# Altium PCB PCB_MRR_ESP_3DP_v0.6.pcbdoc (part 2 of 2)
Units mil, origin at the board's own origin, x right, y up, seen from the top; angles counter-clockwise.
Board outline 5400 x 5140 mil, 2 copper layers (Top Layer, Bottom Layer); 119 components, 151 nets, 453 pads, 98 vias.
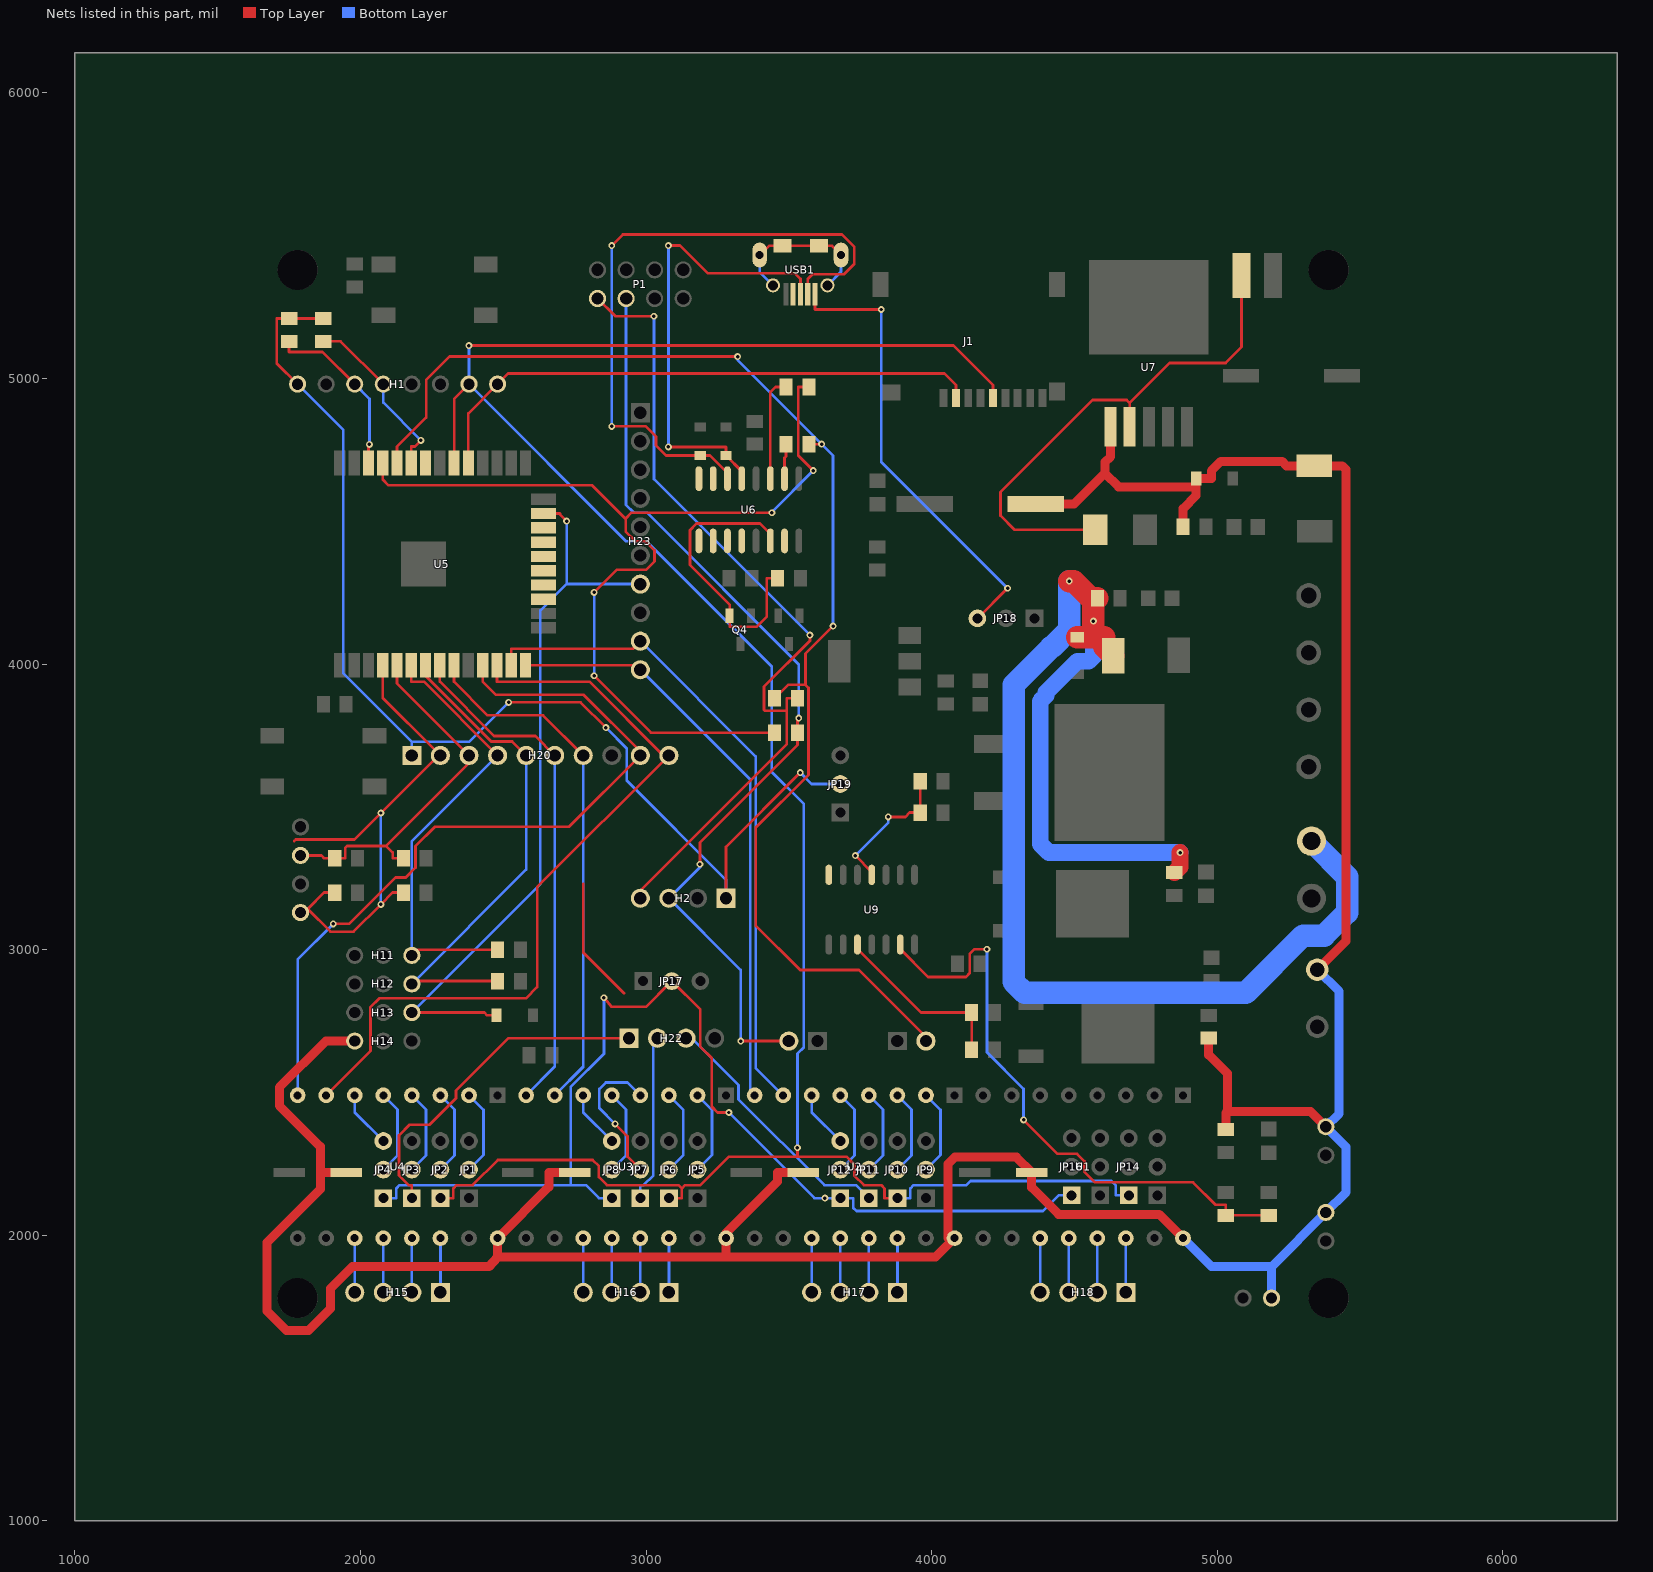
[diagram p2: the nets of this part, all layers, seen from the top]

## Via types
v1: diameter 24.02, hole 12.2, Top Layer to Bottom Layer, 56 vias
v2: diameter 24.4, hole 12, Top Layer to Bottom Layer, 42 vias

## Nets (pads, with @x,y where several pads share a name; then routed paths per layer and width w, separated by ;. In a path a pad name is that pad's centre, name@x,y a point inside that pad or via, vN(x,y) a via of type N, cw(c..) or ccw(c..) an arc to the next point about the centre after c; other vN are vias at no path point) (continued)
RTS: Q4.2 R18.1 U6.14 | length 1041.8
  Top Layer w9.45: U6.14@3435,4431 3435,4455.4 3398.6,4491.8 3177.3,4491.8 3154.1,4468.5 3154.1,4346.6 3292.6,4208.1 Q4.2@3292.6,4169.2 3292.6,4149.8 3292.6,4130.3 3387.2,4130.3 3422.9,4166.1 3422.9,4300 R18.1@3459.99,4300.01
RX: JP21.2 R17.2 R28.1 U5.34 | length 4653
  Top Layer w9.45: U5.34@2128,4704 2128,4761.6 2230,4863.6 2230,4994.7 2311.8,5076.5 v1(3320.5,5076.5) ; R28.1@3450,3880 3497.3,3927.3 3558.3,3927.3 ; R17.2@3569.99,4770.01 3607.1,4770 v1(3614.7,4770) ; v1(3654.7,4132.8) 3558.3,4036.5 3558.3,3927.3 ; JP21.2@3980,2680 3980,2694.3 3745.5,2928.9 3539.8,2928.9 3383.9,3084.8 3383.9,3426.9 3568.7,3611.7 3568.7,3916.9 3558.3,3927.3
  Bottom Layer w9.45: v1(3320.5,5076.5) 3320.5,5064.2 v1(3614.7,4770) 3654.7,4730 v1(3654.7,4132.8)
RXD: H2.4 P1.8 R28.2 | length 2925.3
  Top Layer w9.45: P1.8@2830,5280 2892.2,5217.8 v1(3027.7,5217.8) ; H2.4@2980,3180 2980,3206.9 3492.9,3719.8 3492.9,3836.8 ; R28.2@3530,3880 3492.9,3880 3492.9,3836.8 ; v1(3573.8,4101.2) 3573.8,4081.7 3412.9,3920.9 3412.9,3839.6 3415.7,3836.8 3492.9,3836.8
  Bottom Layer w9.45: v1(3027.7,5217.8) 3027.7,4647.3 v1(3573.8,4101.2)
S$15: 
S$17: 
S$18: 
S$19: 
S$20: 
S$39: 
S$41: 
S$43: 
S$91: 
S$93: 
S$150: 
S$152: 
S$180: 
S$236: 
S$240: 
S$270066:  | length 441.7
  Top Layer w9.45: 2780,3230 2780,2990 2922.6,2847.4
SCK: H1.7 J1.5 JP2.1 JP6.1 JP10.1 JP14.1 U5.30 | length 8475.6
  Top Layer w9.45: JP2.1@2280,2130 2325.3,2130 2325.3,2163.9 2336.6,2175.3 2392.6,2175.3 2481,2263.6 2813.2,2263.6 2834.7,2242.1 2834.7,2203.7 2863.2,2175.3 3113.9,2175.3 3125.3,2163.9 ; U5.30@2327.9,4703.9 2327.9,4927.9 H1.7@2380,4980 ; v1(2380,5115.3) 4076.5,5115.3 4215,4976.8 4215,4953.9 J1.5@4215,4931 ; JP6.1@3080,2130 3125.3,2130 3125.3,2163.9 ; v1(3530,2306.6) 3530,2275.3 ; JP10.1@3880,2130 3834.7,2130 3834.7,2163.9 3823.4,2175.3 3762.4,2175.3 3730,2207.6 3730,2247 3701.8,2275.3 3530,2275.3 ; 3125.3,2163.9 3136.6,2175.3 3190,2175.3 3290,2275.3 3530,2275.3
  Bottom Layer w9.45: v1(2380,5115.3) H1.7@2380,4980 2930,4430 3001.9,4430 3440,3991.9 3440,3621.8 3552.3,3509.5 3552.3,2658.3 3530,2636 v1(3530,2306.6) ; JP10.1@3880,2130 3925.3,2130 3925.3,2163.9 3936.6,2175.3 4121.5,2175.3 4136.2,2190 4628.7,2190 4644.7,2173.9 4644.7,2140 JP14.1@4690,2140
SCL: H1.3 R20.1 U5.36 | length 612.8
  Top Layer w9.45: R20.1@1750,5130 1750,5092.9 1867.1,5092.9 H1.3@1980,4980 ; U5.36@2028,4704 2028,4765.5 v1(2031.6,4769)
  Bottom Layer w9.45: H1.3@1980,4980 2031.6,4928.4 v1(2031.6,4769)
SDA: H1.4 R21.1 U5.33 | length 624
  Top Layer w9.45: R21.1@1870,5130 1930,5130 H1.4@2080,4980 ; U5.33@2178,4704 2178,4761.6 2190.3,4761.6 v1(2211.9,4783.2)
  Bottom Layer w9.45: H1.4@2080,4980 2080,4915.1 v1(2211.9,4783.2)
SS: H1.8 J1.2 U5.29 | length 2001.4
  Top Layer w9.45: U5.29@2377.9,4703.9 2377.9,4877.9 H1.8@2480,4980 2517.3,5017.3 4044.4,5017.3 4085,4976.8 J1.2@4085,4931
TEMP_BED_PIN: C6.1 H10.1 H20.3 R12.1 U5.5 | length 1290.8
  Top Layer w9.45: H10.1@1790,3330 1862.9,3330 1872.9,3320 C6.1@1910,3320 1947.1,3320 1947.1,3357.1 1953.2,3363.2 2090.1,3363.2 ; U5.5@2127.9,3995.9 2127.9,3932.1 H20.3@2380,3680 2380,3653.1 2090.1,3363.2 ; R12.1@2149.99,3320.01 2112.9,3320 2112.9,3340.3 2090.1,3363.2
TEMP_E0_PIN: C5.1 H9.1 H20.2 R11.1 U5.4 | length 1927.6
  Top Layer w9.45: 1767.9,3380 1773.6,3385.7 1978.5,3385.7 v2(2071.4,3478.6) 2260.9,3668.1 H20.2@2260.9,3680 ; H9.1@1790,3130 1802.4,3142.4 1815.3,3142.4 H9.1@1815.4,3142.4 ; C5.1@1910,3200 1872.9,3200 H9.1@1815.4,3142.4 ; U5.4@2077.9,3995.9 2077.9,3882.1 2260.9,3699.1 H20.2@2260.9,3680 ; R11.1@2149.99,3200.01 2112.9,3200 v2(2071.47,3158.53) 1975.9,3062.9 1894.8,3062.9 H9.1@1815.4,3142.4 ; H20.2@2280,3680 H20.2@2260.9,3680
  Bottom Layer w9.45: v2@2070,3160 2071.4,3161.4 v2(2071.4,3478.6)
TMC: JP4.1 JP8.1 JP12.1 JP16.1 JP17.2 | length 3803.8
  Top Layer w9.45: v1(2852.4,2831.9) 2880,2800 3000,2800 3084.1,2884.1 JP17.2@3090,2890 3190,2790 3190,2660 3230,2620 3230,2450 3250,2430 v2(3290,2430)
  Bottom Layer w9.45: JP4.1@2080,2130 2125.3,2130 2125.3,2163.9 2136.6,2175.3 2736.1,2175.3 ; v1(2852.4,2831.9) 2852.4,2635.5 2736.1,2519.2 2736.1,2175.3 ; JP8.1@2880,2130 2834.7,2130 2789.5,2175.3 2736.1,2175.3 ; v2(3290,2430) 3590,2130 v1(3626,2130) JP12.1@3680,2130 3702.6,2130 3725.3,2130 3725.3,2096 3736.6,2084.7 4389.5,2084.7 4444.7,2140 JP16.1@4490,2140
TO_E0: R7.1 R8.1 U9.13 | length 2130.3
  Top Layer w9.45: U9.13@3890,3018 3890,3002.1 3987.6,2904.5 4120,2904.5 4132.9,2917.4 4132.9,2984.8 4149.7,3001.7 v1(4193.6,3001.7) ; v1(4321.8,2404.2) 4440.7,2285.3 4509,2285.3 4535.3,2259 4535.3,2222.2 4572.2,2185.3 4914.7,2185.3 4992.9,2107.1 5030,2107.1 5030,2069.9 R8.1@5180,2069.9
  Bottom Layer w9.45: v1(4193.6,3001.7) 4193.6,2640.9 4321.8,2512.7 v1(4321.8,2404.2)
TO_FAN_E0: R9.1 R10.1 U9.10 | length 637.5
  Top Layer w9.45: U9.10@3740,3018 3740,3002.7 3962.7,2780 R9.1@4139.96,2780.01 R10.1@4139.96,2650.01
TO_HEAT_BED: R5.1 R6.1 U9.4 | length 502.4
  Top Layer w9.45: v1(3733.1,3329.5) 3790,3272.6 U9.4@3790,3262 ; v1(3847.8,3464.8) 3907.7,3464.8 3922.9,3480 R6.1@3959.99,3480.01 R5.1@3959.99,3590.01
  Bottom Layer w9.45: v1(3733.1,3329.5) 3847.8,3444.1 v1(3847.8,3464.8)
TX: R16.2 R27.1 U5.35 | length 3518.6
  Top Layer w9.45: U5.35@2078,4704 2078,4646.4 2098.6,4625.9 2811.5,4625.9 2928.6,4508.8 ; v1(2818.1,3959.2) 3017.3,3760 R27.1@3450,3760 ; v1(2818.1,4250.9) 2897.2,4330 2999.8,4330 3029.3,4359.5 3029.3,4398.2 2997.5,4430 2962.5,4430 2928.6,4463.9 2928.6,4508.8 ; v1(3440.5,4530) 2949.7,4530 2928.6,4508.8 ; R16.2@3569.99,4970.01 3532.9,4970 3532.9,4729.6 v1(3585.4,4677.2)
  Bottom Layer w9.45: v1(2818.1,3959.2) v1(2818.1,4250.9) ; v1(3440.5,4530) 3440.5,4532.2 v1(3585.4,4677.2)
TXD: H2.3 JP20.2 P1.6 R27.2 | length 3338.5
  Top Layer w9.45: v1(3188.6,3299) 3188.6,3375.4 3530,3716.8 R27.2@3530,3760 3530,3806.6 v1(3534.5,3811) ; v1(3331.3,2680) JP20.2@3500,2680
  Bottom Layer w9.45: P1.6@2930,5280 2930,4556.9 2956.9,4530 3003.1,4530 3534.5,3998.6 v1(3534.5,3811) ; v1(3188.6,3299) 3188.6,3288.6 H2.3@3080,3180 3331.3,2928.7 v1(3331.3,2680)
U1_11: H18.4 U1.11 | length 190
  Bottom Layer w9.45: H18.4@4380,1800 U1.11@4380,1990
U1_12: H18.3 U1.12 | length 190
  Bottom Layer w9.45: H18.3@4480,1800 U1.12@4480,1990
U1_13: H18.2 U1.13 | length 190
  Bottom Layer w9.45: H18.2@4580,1800 U1.13@4580,1990
U1_14: H18.1 U1.14 | length 190
  Bottom Layer w9.45: H18.1@4680,1800 U1.14@4680,1990
U2_11: H17.4 U2.11 | length 190
  Bottom Layer w9.45: H17.4@3580,1800 U2.11@3580,1990
U2_12: H17.3 U2.12 | length 190
  Bottom Layer w9.45: H17.3@3680,1800 U2.12@3680,1990
U2_13: H17.2 U2.13 | length 190
  Bottom Layer w9.45: H17.2@3780,1800 U2.13@3780,1990
U2_14: H17.1 U2.14 | length 190
  Bottom Layer w9.45: H17.1@3880,1800 U2.14@3880,1990
U3_11: H16.4 U3.11 | length 190
  Bottom Layer w9.45: H16.4@2780,1800 U3.11@2780,1990
U3_12: H16.3 U3.12 | length 190
  Bottom Layer w9.45: H16.3@2880,1800 U3.12@2880,1990
U3_13: H16.2 U3.13 | length 190
  Bottom Layer w9.45: H16.2@2980,1800 U3.13@2980,1990
U3_14: H16.1 U3.14 | length 190
  Bottom Layer w9.45: H16.1@3080,1800 U3.14@3080,1990
U4_11: H15.4 U4.11 | length 190
  Bottom Layer w9.45: H15.4@1980,1800 U4.11@1980,1990
U4_12: H15.3 U4.12 | length 190
  Bottom Layer w9.45: H15.3@2080,1800 U4.12@2080,1990
U4_13: H15.2 U4.13 | length 190
  Bottom Layer w9.45: H15.2@2180,1800 U4.13@2180,1990
U4_14: H15.1 U4.14 | length 190
  Bottom Layer w9.45: H15.1@2280,1800 U4.14@2280,1990
U5_17: U5.17
U5_18: U5.18
U5_19: U5.19
U5_20: U5.20
U5_21: U5.21
U5_22: U5.22
U5_32: U5.32
U6_2: R17.1 U6.2 | length 123.1
  Top Layer w9.45: U6.2@3485,4649 3485,4721.9 3490,4726.8 R17.1@3489.99,4770.01
U6_3: R16.1 U6.3 | length 365.5
  Top Layer w9.45: U6.3@3435,4649 3435,4952.1 3452.9,4970 R16.1@3489.99,4970.01
U6_5: D5.1 U6.5 USB1.3 | length 1604.5
  Top Layer w9.45: v1(3078.4,4760.1) 3280,4760.1 D5.1@3280,4730.05 3335,4675 U6.5@3335,4649 ; v1(3078.4,5465.2) 3118.9,5465.2 3216.2,5368 3521.2,5368 3540.5,5348.8 USB1.3@3540.5,5295.1
  Bottom Layer w9.45: v1(3078.4,4760.1) v1(3078.4,5465.2)
U6_6: D6.1 U6.6 USB1.2 | length 2325
  Top Layer w9.45: v1(2880,4832.3) 2999.4,4832.3 3034.9,4796.9 3034.9,4765.3 3070.1,4730 D6.1@3190,4730.05 3198.5,4730 3207,4730 3224,4730 3285,4669 U6.6@3285,4649 ; v1(2880,5465.2) 2918.8,5504 3685.8,5504 3728.4,5461.4 3728.4,5399.8 3693.5,5364.9 3582.1,5364.9 3566,5348.8 USB1.2@3566,5295.1
  Bottom Layer w9.45: v1(2880,4832.3) v1(2880,5465.2)
U6_7: U6.7
U6_8: U6.8
U6_9: U6.9
U6_10: U6.10
U6_11: U6.11
U6_12: U6.12
U6_15: U6.15
U7_2: D4.2 L1.1 U7.2 | length 1830.6
  Top Layer w9.45: D4.2@4573,4470 4290.8,4470 4241.1,4519.7 4241.1,4601.7 4563.8,4924.4 4682.8,4924.4 4693.1,4914.2 ; U7.2@4693.1,4831 4693.1,4914.2 ; L1.1@5084.9,5360 5084.9,5109.8 5029.4,5054.3 4833.2,5054.3 4693.1,4914.2
U9_7: U9.7
USB1_0: USB1.0 | length 564.6
  Top Layer w9.45: USB1.0@3397.5,5432.31 3398.9,5432.3 3431.4,5464.9 USB1.0@3477.2,5464.9 3523,5464.9 3523.6,5464.2 USB1.0@3606.3,5464.25 3629.2,5464.2 3652.1,5464.2 3652.1,5462.7 USB1.0@3682.5,5432.31
  Bottom Layer w9.45: USB1.0@3397.5,5432.31 3397.5,5372.8 USB1.0@3444.3,5326.01 ; USB1.0@3634.9,5326.01 3682.5,5373.6 USB1.0@3682.5,5432.31
USB1_4: USB1.4
VBED: CN2.2 D2.2 F1.2 R3.1 R14.1 | length 4981.8
  Top Layer w59.05: R3.1@4850.01,3270.01 4870,3290 v2(4870,3340)
  Top Layer w78.74: v1(4481.5,4290.2) 4497.2,4290.2 R14.1@4566.3,4221.1 ; D2.2@4510,4094 4557.4,4094 ; R14.1@4580,4230 4575.2,4230 R14.1@4566.3,4221.1 ; F1.2@4635.7,4029.5 4604.9,4060.3 4604.9,4094 4557.4,4094 ; 4557.4,4094 4566.3,4102.9 v2(4566.3,4150) R14.1@4566.3,4221.1
  Bottom Layer w59.05: v2(4566.3,4150) 4566.3,4026.3 4550,4010 4510,4010 4400,3900 4400,3890 4380,3870 4380,3370 4410,3340 v2(4870,3340)
  Bottom Layer w78.74: v1(4481.5,4290.2) 4481.5,4119.3 4420.4,4058.1 4417.7,4058.1 4287,3927.4 4287,2887.2 4325.1,2849.1 5100.2,2849.1 5300.2,3049.1 5374,3049.1 5454.7,3129.8 5454.7,3255.3 CN2.2@5330,3380
VIN: C1.1 C2.1 C3.1 C4.1 C9.1 D1.2 F2.2 H7.1 H8.1 H14.1 H19.1 P7.2 R1.1 R2.1 R13.1 U1.16 U2.16 U3.16 U4.16 U7.1 | length 11898.8
  Top Layer w31.5: C1.1@1950,2220 1859.4,2220 ; H14.1@1980,2680 1878.5,2680 1716.1,2517.6 1716.1,2453.9 1859.4,2310.6 1859.4,2220 ; C2.1@2750,2220 2659.4,2220 2659.4,2169.4 U4.16@2480,1990 2480,1923.2 ; C3.1@3550,2220 3459.4,2220 3459.4,2188.2 3280,2008.7 U3.16@3280,1990 3280,1923.2 ; C9.1@4364,4560 4497.9,4560 4606.4,4668.6 ; U7.1@4626.1,4831 4626.1,4726.6 4606.4,4707 4606.4,4668.6 ; U1.16@4880,1990 4796.5,2073.5 4444.3,2073.5 4350,2167.8 C4.1@4350,2220 4296.4,2273.6 4081,2273.6 4057.8,2250.4 4057.8,1990 U2.16@4080,1990 4057.8,1967.8 4013.2,1923.2 3280,1923.2 ; R13.1@4880,4480 4880,4544.5 4926,4590.5 4926,4620.3 ; R1.1@4970,2690 4970,2631.7 5034.9,2566.9 5034.9,2433.1 ; R2.1@5030.1,2370 5030.1,2428.3 5034.9,2433.1 ; P7.2@5350,2930 5449.8,3029.8 5449.8,4681.5 5437,4694.3 5339.5,4694.3 5242,4694.3 5226.9,4709.5 5012.2,4709.5 4979.4,4676.7 4979.4,4650 D1.2@4926,4650 4926,4620.3 ; H19.1@5380,2380 5326.9,2433.1 5034.9,2433.1 ; 1859.4,2220 1859.4,2161.3 1673.5,1975.4 1673.5,1734.5 1741.6,1666.5 1817.9,1666.5 1895.9,1744.5 1895.9,1814.5 1971.3,1890 2450,1890 2480,1923.2 ; 2480,1923.2 3280,1923.2 ; 4606.4,4668.6 4654.7,4620.3 4926,4620.3
  Bottom Layer w31.5: U1.16@4880,1990 4980,1890 5190,1890 ; H8.1@5190,1780 5190,1890 ; P7.2@5350,2930 5426.3,2853.7 5426.3,2426.3 H19.1@5380,2380 5451.2,2308.8 5451.2,2151.2 H7.1@5380,2080 5190,1890
VOUT: H1.1 H2.1 H20.1 JP19.2 R20.2 R21.2 | length 4138.5
  Top Layer w9.45: H1.1@1780,4980 1706.8,5053.2 1706.8,5210 R20.2@1750,5210 R21.2@1870,5210 ; v1(2518.8,3865.9) 2770.9,3865.9 v1(2859.5,3777.3) ; H2.1@3280,3180 3280,3360.2 v1(3539.8,3620)
  Bottom Layer w9.45: H1.1@1780,4980 1940,4820 1940,3967.7 2180,3727.7 ; H20.1@2180,3680 2180,3723 2180,3727.7 ; v1(2518.8,3865.9) 2380.6,3727.7 2180,3727.7 ; v1(2859.5,3777.3) 2932.3,3704.5 2932.3,3592.4 3280,3244.7 3280,3227.8 H2.1@3280,3180 ; v1(3539.8,3620) 3579.8,3580 JP19.2@3680,3580
VUSB: JP18.3 USB1.1 | length 1593.7
  Top Layer w9.45: USB1.1@3591.6,5295.1 3591.6,5241.4 v1(3823.4,5241.4) ; JP18.3@4160,4160 v1(4265.5,4265.5)
  Bottom Layer w9.45: v1(3823.4,5241.4) 3823.4,4707.6 v1(4265.5,4265.5)
X_CS: H22.1 JP3.1 | length 1207.2
  Top Layer w9.45: JP3.1@2180,2130 2180,2175.3 2168.7,2175.3 2134.7,2209.2 2134.7,2349.8 2172,2387 2241.9,2387 2334.7,2479.8 2334.7,2506.7 2518,2690 2892.2,2690 H22.1@2940,2690
X_DIR_PIN: H20.9 U4.8 U5.11 | length 2740.5
  Top Layer w9.45: v1(1904.7,3090.4) 1960.2,3090.4 2122.5,3252.7 2158.5,3252.7 2192.9,3287.1 2192.9,3362.2 2261.2,3430.4 2730.5,3430.4 H20.9@2980,3680 2980,3694 2781.8,3892.2 2473.9,3892.2 2427.8,3938.2 U5.11@2427.8,3995.8
  Bottom Layer w9.45: U4.8@1780,2490 1780,2965.8 v1(1904.7,3090.4)
X_MIN: H11.3 H20.4 R24.1 U5.6 | length 1599.2
  Top Layer w9.45: U5.6@2177.9,3995.9 2177.9,3938.3 2221.7,3938.3 H20.4@2480,3680 ; H11.3@2180,2980 2200,3000 R24.1@2480,3000
  Bottom Layer w9.45: H11.3@2180,2980 2180,3380 H20.4@2480,3680
X_MS1: JP1.2 U4.2 | length 302.3
  Bottom Layer w9.45: JP1.2@2380,2230 2431,2280.9 2431,2439 U4.2@2380,2490
X_MS2: JP2.2 U4.3 | length 300.8
  Bottom Layer w9.45: JP2.2@2280,2230 2329.3,2279.3 2329.3,2440.7 U4.3@2280,2490
X_MS3: JP3.2 U4.4 | length 300.9
  Bottom Layer w9.45: JP3.2@2180,2230 2229.4,2279.4 2229.4,2440.6 U4.4@2180,2490
X_RST: JP4.2 U4.5 | length 301.4
  Bottom Layer w9.45: JP4.2@2080,2230 2130,2280 2130,2440 U4.5@2080,2490
X_SLP: JP4.3 U4.6 | length 201.4
  Bottom Layer w9.45: U4.6@1980,2490 1980,2430 JP4.3@2080,2330
X_STEP_PIN: H20.10 U4.7 U5.12 | length 2754.7
  Top Layer w9.45: U4.7@1880,2490 2035.3,2645.2 2035.3,2798.8 2065.8,2829.4 2579.6,2829.4 2618.8,2868.6 2618.8,3218.8 H20.10@3080,3680 3060.2,3680 2801.8,3938.3 2477.9,3938.3 U5.12@2477.9,3995.9
Y_CS: H22.2 JP7.1 | length 591.5
  Bottom Layer w9.45: JP7.1@2980,2130 2980,2175.3 2991.3,2175.3 3025.3,2209.2 3025.3,2675.3 H22.2@3040,2690
Y_DIR_PIN: H20.6 U3.8 U5.8 | length 1798.2
  Top Layer w9.45: U5.8@2277.8,3995.8 2277.8,3938.2 2468.1,3747.9 2612.1,3747.9 H20.6@2680,3680
  Bottom Layer w9.45: U3.8@2580,2490 2680,2590 H20.6@2680,3680
Y_MIN: H12.3 H20.5 R25.1 U5.7 | length 1774.4
  Top Layer w9.45: H12.3@2180,2880 2190,2890 R25.1@2480,2890 ; U5.7@2227.9,3995.9 2227.9,3959 2458,3728.9 2531.1,3728.9 H20.5@2580,3680
  Bottom Layer w9.45: H12.3@2180,2880 2580,3280 H20.5@2580,3680
Y_MS1: JP5.2 U3.2 | length 302.3
  Bottom Layer w9.45: JP5.2@3180,2230 3231,2280.9 3231,2439 U3.2@3180,2490
Y_MS2: JP6.2 U3.3 | length 301.4
  Bottom Layer w9.45: JP6.2@3080,2230 3130,2280 3130,2440 U3.3@3080,2490
Y_MS3: JP7.2 U3.4 | length 513.5
  Top Layer w9.45: v1(2891.4,2389.8) 2934.7,2346.5 2934.7,2275.3 JP7.2@2980,2230
  Bottom Layer w9.45: v1(2891.4,2389.8) 2836.5,2444.7 2836.5,2512.6 2859,2535.1 2934.9,2535.1 U3.4@2980,2490
Y_RST: JP8.2 U3.5 | length 301.4
  Bottom Layer w9.45: JP8.2@2880,2230 2930,2280 2930,2440 U3.5@2880,2490
Y_SLP: JP8.3 U3.6 | length 201.4
  Bottom Layer w9.45: U3.6@2780,2490 2780,2430 JP8.3@2880,2330
Y_STEP_PIN: H20.7 U3.7 U5.9 | length 1848.2
  Top Layer w9.45: U5.9@2327.8,3995.8 2327.8,3938.2 2445.4,3820.6 2639.4,3820.6 H20.7@2780,3680
  Bottom Layer w9.45: U3.7@2680,2490 2780,2590 H20.7@2780,3680
Z_CS: H22.3 JP11.1 | length 900.8
  Bottom Layer w9.45: H22.3@3140,2690 3158.7,2690 3323.3,2525.4 3323.3,2476.1 3624.1,2175.3 3734.7,2175.3 JP11.1@3780,2130
Z_DIR_PIN: H23.10 U2.8 U5.14 | length 2064.4
  Top Layer w9.45: U5.14@2577.9,3995.9 2964.1,3995.9 H23.10@2980,3980
  Bottom Layer w9.45: H23.10@2980,3980 3364.8,3595.2 3364.8,2505.2 U2.8@3380,2490
Z_MIN: D3.2 H13.3 H23.7 U5.23 | length 2596.9
  Top Layer w9.45: H13.3@2180,2780 2433.8,2780 2443.8,2770 D3.2@2476,2770 ; U5.23@2641,4526.9 2698.6,4526.9 2698.6,4523.6 v1(2721.9,4500.3)
  Bottom Layer w9.45: H13.3@2180,2780 2630,3230 2630,4188.1 2721.9,4280 ; v1(2721.9,4500.3) 2721.9,4280 ; H23.7@2980,4280 2721.9,4280
Z_MS1: JP9.2 U2.2 | length 302.3
  Bottom Layer w9.45: JP9.2@3980,2230 4031,2280.9 4031,2439 U2.2@3980,2490
Z_MS2: JP10.2 U2.3 | length 300.8
  Bottom Layer w9.45: JP10.2@3880,2230 3929.3,2279.3 3929.3,2440.7 U2.3@3880,2490
Z_MS3: JP11.2 U2.4 | length 300.9
  Bottom Layer w9.45: JP11.2@3780,2230 3829.4,2279.4 3829.4,2440.6 U2.4@3780,2490
Z_RST: JP12.2 U2.5 | length 301.4
  Bottom Layer w9.45: JP12.2@3680,2230 3730,2280 3730,2440 U2.5@3680,2490
Z_SLP: JP12.3 U2.6 | length 201.4
  Bottom Layer w9.45: U2.6@3580,2490 3580,2430 JP12.3@3680,2330
Z_STEP_PIN: H23.9 U2.7 U5.13 | length 2317.8
  Top Layer w9.45: U5.13@2527.9,3995.9 2527.9,4053.5 2953.5,4053.5 H23.9@2980,4080
  Bottom Layer w9.45: H23.9@2980,4080 3383.8,3676.2 3383.8,2586.2 U2.7@3480,2490
pads on no net: H3.1 H4.1 H5.1 H6.1 P1.5 P1.7 U5.39 U7.6
copper on no net:
  other v2: 2100,4240 2260,4240 2400,4240 2100,4350 2260,4350 2400,4350 2100,4470 2260,4470 2400,4470 4650,5150 4890,5150 4650,5350 4890,5350

## Polygon pours and split planes (outlines as drawn)
GND on Bottom Layer (solid): 1590,4740 1900,4750 1910,3960 1580,3940 1680,1580 5710,1540 5690,5640 1570,5580
GND on Top Layer (solid): 1580,4750 1910,4730 1880,3950 1600,3950 1560,1500 5900,1610 5730,5600 1500,5630

## Other copper
Top Layer:
  region net Q2_4: 4360,3290 4780,3290 4780,2920 4360,2920 4360,3010 4360,3170
  region: 2030,4150 2030,4560 2500,4560 2500,4150
  region net LED5_2: 4460,3860 5160,3860 5160,3340 4970,3330 4940,3380 4890,3380 4460,3380
  region: 4500,5490 4500,5070 5020,5070 5020,5490
  region net LED5_2: 4930,3370 4930,3250 5100,3250 5100,3130 5230,3130 5230,3480 5130,3480 5130,3370 4940,3360
  pour cut-out: 2650,5600 3300,5600 3270,5220 2630,5220 2650,5300
  pour cut-out: 1750,3490 1840,3490 1840,3080 1740,3070
  pour cut-out: 1930,3030 2250,3020 2230,2640 1930,2610 1920,2620
  pour cut-out: 2880,2740 3290,2750 3300,2600 2880,2620
  pour cut-out: 3440,2730 3740,2730 3900,2740 4040,2730 4040,2630 3740,2620 3440,2620 3440,2640
  pour cut-out: 2920,2950 3220,2950 3240,2840 2940,2830
  pour cut-out: 2970,3260 3360,3240 3320,3110 2910,3140
  pour cut-out: 4750,1750 4750,1860 4320,1860 4330,1750
  pour cut-out: 3940,1740 3940,1870 3490,1870 3490,1740
  pour cut-out: 1930,1750 1930,1860 2340,1850 2330,1760 2330,1750
  pour cut-out: 2710,1740 2720,1860 3150,1850 3140,1710
  pour cut-out: 1730,1920 1720,2040 4920,2040 4920,1950
  pour cut-out: 4850,2090 4830,2400 4430,2400 4430,2090
  pour cut-out: 4030,2090 4040,2380 3620,2390 3640,2080
  pour cut-out: 3260,2100 3210,2380 2830,2350 2840,2090
  pour cut-out: 2440,2090 2430,2370 2020,2380 2030,2080
  pour cut-out: 1740,2550 4920,2530 4950,2430 1720,2440 1730,2490
  pour cut-out: 5650,4360 5190,4350 5190,2630 5610,2630
  pour cut-out: 5350,2450 5460,2440 5430,1930 5320,1930 5310,1950
  pour cut-out: 5290,1700 5280,1870 5030,1860 5020,1730 5020,1690
  pour cut-out: 1720,5060 2560,5050 2550,4920 1710,4920
  pour cut-out: 2890,4970 3050,4960 3050,3890 2920,3920
  pour cut-out: 2120,3760 3150,3760 3110,3610 2110,3610
  pour cut-out: 3360,5570 3750,5560 3720,5270 3380,5280 3370,5280
  pour cut-out: 3610,3750 3730,3750 3730,3420 3620,3420
Bottom Layer:
  region net LED5_2: 4430,3860 4430,3380 5160,3380 5160,3860
  region net Q2_4: 4360,3290 4780,3290 4780,2920 4360,2920 4360,3010 4360,3170
  region: 2030,4150 2030,4560 2500,4560 2500,4150
  region net LED7_2: 4340,2770 4830,2770 4830,2590 4340,2590
  region: 4500,5490 4500,5070 5020,5070 5020,5490
  pour cut-out: 5710,2580 5240,2600 5200,4350 5720,4350
  pour cut-out: 5320,2450 5450,2440 5450,2250 5330,2210
  pour cut-out: 5330,2150 5430,2130 5460,1910 5320,1920
  pour cut-out: 2850,2720 2860,2960 3340,2960 3300,2760 3300,2620 2900,2630 2880,2630
  pour cut-out: 2890,3250 3340,3250 3360,3080 2880,3100 2890,3100
  pour cut-out: 1930,3050 2230,3050 2230,2610 1920,2620
  pour cut-out: 4930,2570 1730,2550 1720,2420 4930,2430
  pour cut-out: 3470,2750 4040,2750 4020,2610 3460,2600 3430,2720
  pour cut-out: 3610,2390 4060,2390 4030,2060 3600,2080
  pour cut-out: 4890,2040 1720,2050 1730,1950 4910,1950
  pour cut-out: 2030,2400 2450,2380 2430,2080 2020,2090 2030,2100
  pour cut-out: 2820,2380 3230,2390 3220,2090 2830,2070
  pour cut-out: 4420,2390 4840,2390 4840,2070 4430,2080
  pour cut-out: 1920,1880 2360,1860 2350,1730 1930,1750
  pour cut-out: 2670,1900 3170,1870 3120,1710 2730,1730
  pour cut-out: 3510,1850 3960,1840 3930,1730 3520,1730 3510,1750
  pour cut-out: 4290,1870 4760,1860 4740,1720 4310,1730
  pour cut-out: 2870,4990 3070,4960 3070,3900 2860,3920
  pour cut-out: 2110,3800 3160,3780 3120,3560 2120,3590
  pour cut-out: 1740,3510 1840,3510 1840,3080 1720,3090 1720,3100
  pour cut-out: 3580,3760 3740,3760 3740,3400 3600,3420 3610,3430
  pour cut-out: 2690,5630 2690,5180 3310,5190 3300,5600
  pour cut-out: 1720,5070 2560,5070 2540,4900 1700,4900
  pour cut-out: 3360,5600 3750,5560 3720,5280 3380,5300 3360,5460
  pour cut-out: 5020,1840 5250,1840 5250,1710 5010,1710

## Silkscreen, mask and mechanical layers (free items; w line width, h text height)
Top Overlay:
  text "TF_Card" at 4030,5216.07 h33.46
  text "IO5" at 2499.68,5060 h39.37 r90
  text "GND" at 2800,4848.81 h39.37
  text "SS" at 2499.68,4840 h39.37 r90
  text "GND" at 1899.68,4800 h39.37 r90
  text "SCL" at 1999.68,4800 h39.37 r90
  text "SDA" at 2099.68,4800 h39.37 r90
  text "SCK" at 2399.68,4800 h39.37 r90
  text "MOSI" at 2198.18,4780.6 h39.37 r90
  text "MISO" at 2298.18,4780.6 h39.37 r90
  text "Vout" at 1799.68,4779.66 h39.37 r89
  text "IO17" at 2800,4750.31 h39.37
  text "5V" at 3857.39,4706.13 h33.46 r86
  text "IO16" at 2800,4650.31 h39.37
  text "IO4" at 2820,4550.31 h39.37
  text "VIN" at 5089.71,4542.57 h33.46 r359
  text "IO0" at 2820,4450.31 h39.37
  text "IO2" at 2820,4350.31 h39.37
  text "VBED" at 4760,4284.97 h33.46
  text "IO15" at 2800,4250.31 h39.37
  text "USB" at 4120,4233.27 h33.46
  text "PWR" at 4319.71,4233.27 h33.46 r359
  text "VIN" at 5021.72,4193.48 h59.05 r89
  text "12-24V" at 5075.03,4175.1 h33.46 r90
  text "IO13" at 2800,4150.31 h39.37
  text "IO14" at 2800,4050.32 h39.37
  text "5V_SEL" at 4160,4038.82 h39.37
  text "GND" at 5021.73,3989.1 h59.05 r90
  text "IO12" at 2800,3950.32 h39.37
  text "3V" at 4228.54,3945.03 h33.46 r355
  text "VP" at 2299.64,3771.37 h39.37 r94
  text "VN" at 2399.68,3770 h39.37 r90
  text "IO34" at 2499.68,3770 h39.37 r90
  text "IO35" at 2599.68,3770 h39.37 r90
  text "IO32" at 2699.68,3770 h39.37 r90
  text "IO33" at 2791.18,3770 h39.37 r90
  text "IO25" at 2889.68,3770 h39.37 r90
  text "IO26" at 2999.68,3770 h39.37 r90
  text "IO27" at 3099.68,3770 h39.37 r90
  text "Vout" at 2199.68,3759.66 h39.37 r89
  text "12-24V" at 5076.73,3750 h33.46 r90
  text "VBED" at 5029.53,3740 h59.05 r90
  text "3.3V" at 3613.93,3635.8 h33.46 r90
  text "GND" at 5029.53,3560 h59.05 r90
  text "T_BED" at 1667.5,3500 h45 r270
  text "MRR_ESP_3DP" at 2300,3460.63 h78.74
  text "v0.6" at 3180,3460.63 h78.74
  text "Vout_SEL" at 3789.68,3450.34 h39.37 r91
  text "5V" at 3613.89,3446.43 h33.46 r86
  text "Vout" at 3260.32,3390.34 h39.37 r269
  text "GND" at 3160.32,3370 h39.37 r270
  text "BED" at 4949.42,3343.6 h47.24 r90
  text "RX" at 2960.32,3340 h39.37 r270
  text "TX" at 3060.32,3340 h39.37 r270
  text "BED+" at 5081.73,3283.8 h59.05 r90
  text "T_E0" at 1667.5,3240 h45 r270
  text "-" at 5060,3181.23 h59.05 r180
  text "V  G  S" at 1970,3060.32 h39.37
  text "Licensed under CERN OHL v.1.2" at 2660,3047.01 h39.37
  text "E0" at 4929.42,2997.8 h47.24 r90
  text "X_MIN" at 2260,2960.32 h39.37
  text "E0+" at 5111.73,2863.8 h59.05 r90
  text "Y_MIN" at 2260,2860.32 h39.37
  text "SPI" at 2929.42,2841.5 h47.24 r90
  text "UART" at 3309.42,2823.31 h47.24 r91
  text "Z_MIN" at 2259.66,2760.32 h39.37 r359
  text "PD_UART_EN" at 3550,2760.32 h39.37
  text "-" at 5090,2729.53 h59.05 r180
  text "Z_PROBE" at 2260,2660.32 h39.37
  text "TX" at 3680,2643.27 h33.46
  text "RX" at 3760,2643.27 h33.46
  text "X  Y  Z  E0" at 2900,2556.38 h47.24
  text "PART / FAN" at 5361.19,2459.4 h39.37 r90
  text "+" at 5279.12,2410.88 h59.05 r225
  text "RST" at 2040,2403.27 h33.46
  text "MS3" at 2140,2403.27 h33.46
  text "MS2" at 2250,2403.27 h33.46
  text "MS1" at 2360,2403.27 h33.46
  text "RST" at 2840,2403.27 h33.46
  text "MS3" at 2940,2403.27 h33.46
  text "MS2" at 3050,2403.27 h33.46
  text "MS1" at 3160,2403.27 h33.46
  text "RST" at 3630,2403.27 h33.46
  text "MS3" at 3730,2403.27 h33.46
  text "MS2" at 3840,2403.27 h33.46
  text "MS1" at 3950,2403.27 h33.46
  text "RST" at 4440,2403.27 h33.46
  text "MS3" at 4550,2403.27 h33.46
  text "MS2" at 4660,2403.27 h33.46
  text "MS1" at 4770,2403.27 h33.46
  text "-" at 5280,2256.27 h59.05
  text "VMOT" at 2463.27,2160 h33.46 r270
  text "VMOT" at 3263.27,2160 h33.46 r270
  text "VMOT" at 4063.27,2160 h33.46 r270
  text "VMOT" at 4863.27,2160 h33.46 r270
  text "+" at 5279.12,2120.88 h59.05 r225
  text "TMC" at 4440,2043.27 h33.46
  text "SPI" at 4550,2043.27 h33.46
  text "SPI" at 4650,2043.27 h33.46
  text "SPI" at 4750,2043.27 h33.46
  text "TMC" at 2040,2033.27 h33.46
  text "SPI" at 2150,2033.27 h33.46
  text "SPI" at 2250,2033.27 h33.46
  text "SPI" at 2350,2033.27 h33.46
  text "TMC" at 2840,2033.27 h33.46
  text "SPI" at 2950,2033.27 h33.46
  text "SPI" at 3050,2033.27 h33.46
  text "SPI" at 3150,2033.27 h33.46
  text "TMC" at 3640,2033.27 h33.46
  text "SPI" at 3750,2033.27 h33.46
  text "SPI" at 3850,2033.27 h33.46
  text "SPI" at 3950,2033.27 h33.46
  text "-" at 5280,1960.47 h59.05
  text "E0 FAN" at 5509.69,1930 h39.37 r90
  text "-" at 5089.53,1890 h59.05 r90
  text "+" at 5180.88,1869.12 h59.05 r45
  text "CASE / FAN" at 4870,1828.82 h39.37
  text "X_MOTOR" at 1960.41,1680.58 h47.24 r1
  text "Y_MOTOR" at 2760.41,1676.38 h47.24 r1
  text "Z_MOTOR" at 3570,1676.38 h47.24
  text "E0_MOTOR" at 4370,1666.38 h47.24

## Text inside footprints (layer, text, board x,y; h text height)
U5: Top Overlay "ESP WROOM 32" at 1935.3,4139.9 h40 r90